# EAGLE board Greenhouse Monitoring System (EAGLE 9.7.0)

Size 504.31 x 150.62 mm. Coordinates in mm from the lower left corner, seen from the top.
Outline: 0,0 504.31,0 504.31,150.62 0,150.62 0,0
Copper layers (1*16): Top 0.035mm / dielectric 1.5mm / Bottom 0.035mm
Design rules "default": minimum track width 6mil, minimum drill 0.35mm, track to track 6mil, track to pad 6mil, pad to pad 6mil, via to via 6mil, smd to smd 6mil, copper to edge 40mil, drill to drill 6mil, minimum pad ring 10mil, minimum via ring 8mil, stop-mask expansion 4mil, vias tented up to drill 0mil, thermal gap 10mil

## Footprints (pad centres in the part's own frame; a part is rotated, then mirrored left to right if it is on the bottom)
BATTERY-GENERIC = drill 1.118 pad 3.15 octagon: + 2.54,0; - -2.54,0
LEDRD254W60D565H860B = drill 0.981 pad 1.581: 1 -1.27,0; 2 1.27,0
HC-SR04 = drill 1.016 long: 1 -3.81,0; 2 -1.27,0; 3 1.27,0; 4 3.81,0
MQ-XX-SOCKET = drill 1.27: 1 -6.223,6.223; 2 -8.788,0; 3 -6.223,-6.223; 4 6.223,-6.223; 5 8.788,0; 6 6.223,6.223
1X08 = drill 1.016 long: 1 -8.89,0; 2 -6.35,0; 3 -3.81,0; 4 -1.27,0; 5 1.27,0; 6 3.81,0; 7 6.35,0; 8 8.89,0
MOTOR = drill 1.118 pad 3.15 octagon: + 2.54,0; - -2.54,0
PIEZO = drill 1 pad 1.6: 1 -3.5,0; 2 3.5,0
RESAD1016W63L850D250B = drill 0.83 pad 1.43: 1 -5.08,0; 2 5.08,0
GL5528 = drill 0.8 pad 1.4: 1 -1.702,0; 2 1.702,0
HA-06-SM065 = drill 1 pad 1.676: 1 -2.54,-2.54; 2 0,2.54; 3 2.54,-2.54
SG90 = drill 1.016 long: 1 -2.54,0; 2 0,0; 3 2.54,0
ARDUINO-UNO-R3-SHIELD = drill 1.016 pad 1.88: 3.3V 24.13,-2.54; 5V 24.13,0; A0 24.13,12.7; A1 24.13,15.24; A2 24.13,17.78; A3 24.13,20.32; A4 24.13,22.86; A5 24.13,25.4; AREF -24.13,-13.97; D2 -24.13,20.32; D3 -24.13,17.78; D4 -24.13,15.24; D5 -24.13,12.7; D6 -24.13,10.16; D7 -24.13,7.62; D8 -24.13,3.81; D9 -24.13,1.27; D10 -24.13,-1.27; D11 -24.13,-3.81; D12 -24.13,-6.35; D13 -24.13,-8.89; GND@0 24.13,2.54; GND@1 24.13,5.08; GND@2 -24.13,-11.43; IOREF 24.13,-7.62; NC 24.13,-10.16; RES 24.13,-5.08; RX -24.13,25.4; SCL -24.13,-19.05; SDA -24.13,-16.51; TX -24.13,22.86; VIN 24.13,7.62
JHD-162A = drill 1.016 long: 1 -19.05,0; 2 -16.51,0; 3 -13.97,0; 4 -11.43,0; 5 -8.89,0; 6 -6.35,0; 7 -3.81,0; 8 -1.27,0; 9 1.27,0; 10 3.81,0; 11 6.35,0; 12 8.89,0; 13 11.43,0; 14 13.97,0; 15 16.51,0; 16 19.05,0
TO92 = drill 0.813 octagon: 1 -1.27,0; 2 0,1.905; 3 1.27,0
DIP762W53P254L1969H508Q16B = drill 0.743 pad 1.343: 1 -3.81,8.89; 2 -3.81,6.35; 3 -3.81,3.81; 4 -3.81,1.27; 5 -3.81,-1.27; 6 -3.81,-3.81; 7 -3.81,-6.35; 8 -3.81,-8.89; 9 3.81,-8.89; 10 3.81,-6.35; 11 3.81,-3.81; 12 3.81,-1.27; 13 3.81,1.27; 14 3.81,3.81; 15 3.81,6.35; 16 3.81,8.89

## Placement (x,y rotation side)
BAT1  9V  [BATTERY-GENERIC]  23.36,95.69 90 top
D1  RED  [LEDRD254W60D565H860B]  109.85,47.03 0 top
DIST1  DISTANCE-SENSOR-4PINHC-SR04  [HC-SR04]  336.61,52.68 180 top
GAS1  GAS-SENSORMQ-XX-SOCKET  [MQ-XX-SOCKET]  393.76,46.33 90 top
KEYPAD1  KEYPAD-4X4  [1X08]  490.98,6.35 0 top
M1  MOTOR_HDR  [MOTOR]  8.26,21.26 90 top
M2  MOTOR_HDR  [MOTOR]  9.33,58.65 90 top
PIEZO1  PIEZO  [PIEZO]  372.17,50.14 180 top
R1  220  [RESAD1016W63L850D250B]  198.54,128.33 270 top
R2  1k  [RESAD1016W63L850D250B]  108.58,31.79 0 top
R3  PHOTOCELL_GL5528  [GL5528]  102.23,34.33 0 top
R4  220  [RESAD1016W63L850D250B]  111.12,52.11 90 top
R5  1k  [RESAD1016W63L850D250B]  388.68,62.84 90 top
R6  1k  [RESAD1016W63L850D250B]  378.52,57.76 90 top
RPOT1  250k  [HA-06-SM065]  157.9,102.93 0 top
SERVO1  SERVOSG90  [SG90]  419.77,76.86 0 top
U1  ARDUINO-UNO-R3-SHIELD  [ARDUINO-UNO-R3-SHIELD]  94.63,114.17 270 top
U2  LCD-16X2JHD-162A  [JHD-162A]  180.08,75.97 0 top
U3  TMP36GT9Z_TO92  [TO92]  93.34,34.33 0 top
U7  L293E  [DIP762W53P254L1969H508Q16B]  64.13,38.14 90 top
U8  ARDUINO-UNO-R3-SHIELD  [ARDUINO-UNO-R3-SHIELD]  299.92,120.77 90 top

## Library data of the parts
BAT1 DIST1 GAS1 KEYPAD1 M1 M2 PIEZO1 R1-R6 RPOT1 SERVO1 U1-U3 U7 U8 = Tinkercad
D1 = Tinkercad; CATEGORY: Opto-Electronic; SUB-CATEGORY: LED; VALUE: LED_RED

## Nets
BAT1+: BAT1.+ U7.8 U7.16
BAT1-: BAT1.- R2.2 R4.2 RPOT1.3 U1.GND@0 U1.GND@1 U1.GND@2 U2.1 U2.5 U2.16 U3.1 U7.4 U7.5 U7.12 U7.13
D1_C: D1.2 R4.1
M1_+: M1.+ U7.3
M1_-: M1.- U7.6
M2_+: M2.+ U7.11
M2_-: M2.- U7.14
PIEZO1_1: PIEZO1.1 R6.1
U1_5V: R1.1 R3.1 RPOT1.1 U1.5V U2.2 U3.3 U7.1 U7.9
U1_A0: U1.A0 U3.2
U1_A1: R2.1 R3.2 U1.A1
U1_D2: U1.D2 U2.14
U1_D3: U1.D3 U2.13
U1_D4: U1.D4 U2.12
U1_D5: U1.D5 U2.11
U1_D6: U1.D6 U2.6
U1_D7: U1.D7 U2.4
U1_D8: U1.D8 U7.7
U1_D9: U1.D9 U7.2
U1_D10: U1.D10 U7.10
U1_D11: U1.D11 U7.15
U1_D12: D1.1 U1.D12
U1_RX: U1.RX U8.TX
U2_LED+: R1.2 U2.15
U2_VO: RPOT1.2 U2.3
U8_5V: DIST1.1 GAS1.1 GAS1.2 GAS1.3 SERVO1.2 U8.5V
U8_A0: GAS1.4 GAS1.6 R5.1 U8.A0
U8_D2: KEYPAD1.8 U8.D2
U8_D3: KEYPAD1.7 U8.D3
U8_D4: KEYPAD1.6 U8.D4
U8_D5: KEYPAD1.5 U8.D5
U8_D6: KEYPAD1.4 U8.D6
U8_D7: KEYPAD1.3 U8.D7
U8_D8: KEYPAD1.2 U8.D8
U8_D9: KEYPAD1.1 U8.D9
U8_D10: DIST1.3 U8.D10
U8_D11: DIST1.2 U8.D11
U8_D12: SERVO1.3 U8.D12
U8_D13: R6.2 U8.D13
U8_GND: DIST1.4 GAS1.5 PIEZO1.2 R5.2 SERVO1.1 U8.GND@0 U8.GND@1 U8.GND@2
U8_RX: U1.TX U8.RX

## Tracks (layer width: path | path; a pad name or v marks a point on that pad's centre or on a via)
BAT1+  (2 unrouted)
BAT1-  (14 unrouted)
D1_C  (1 unrouted)
M1_+  (1 unrouted)
M1_-  (1 unrouted)
M2_+  (1 unrouted)
M2_-  (1 unrouted)
PIEZO1_1  (1 unrouted)
U1_5V  (7 unrouted)
U1_A0  (1 unrouted)
U1_A1  (2 unrouted)
U1_D2  (1 unrouted)
U1_D3  (1 unrouted)
U1_D4  (1 unrouted)
U1_D5  (1 unrouted)
U1_D6  (1 unrouted)
U1_D7  (1 unrouted)
U1_D8  (1 unrouted)
U1_D9  (1 unrouted)
U1_D10  (1 unrouted)
U1_D11  (1 unrouted)
U1_D12  (1 unrouted)
U1_RX  (1 unrouted)
U2_LED+  (1 unrouted)
U2_VO  (1 unrouted)
U8_5V  (5 unrouted)
U8_A0  (3 unrouted)
U8_D2  (1 unrouted)
U8_D3  (1 unrouted)
U8_D4  (1 unrouted)
U8_D5  (1 unrouted)
U8_D6  (1 unrouted)
U8_D7  (1 unrouted)
U8_D8  (1 unrouted)
U8_D9  (1 unrouted)
U8_D10  (1 unrouted)
U8_D11  (1 unrouted)
U8_D12  (1 unrouted)
U8_D13  (1 unrouted)
U8_GND  (7 unrouted)
U8_RX  (1 unrouted)